# Altium PCB msp430g2553.PcbDoc
Units mm, origin at the board's own origin, x right, y up, seen from the top; angles counter-clockwise.
Board outline 62.36 x 83.44 mm, 2 copper layers (Top Layer, Bottom Layer); 27 components, 20 nets, 111 pads, 11 vias.
Unrouted connection lines stored in the file: 4.
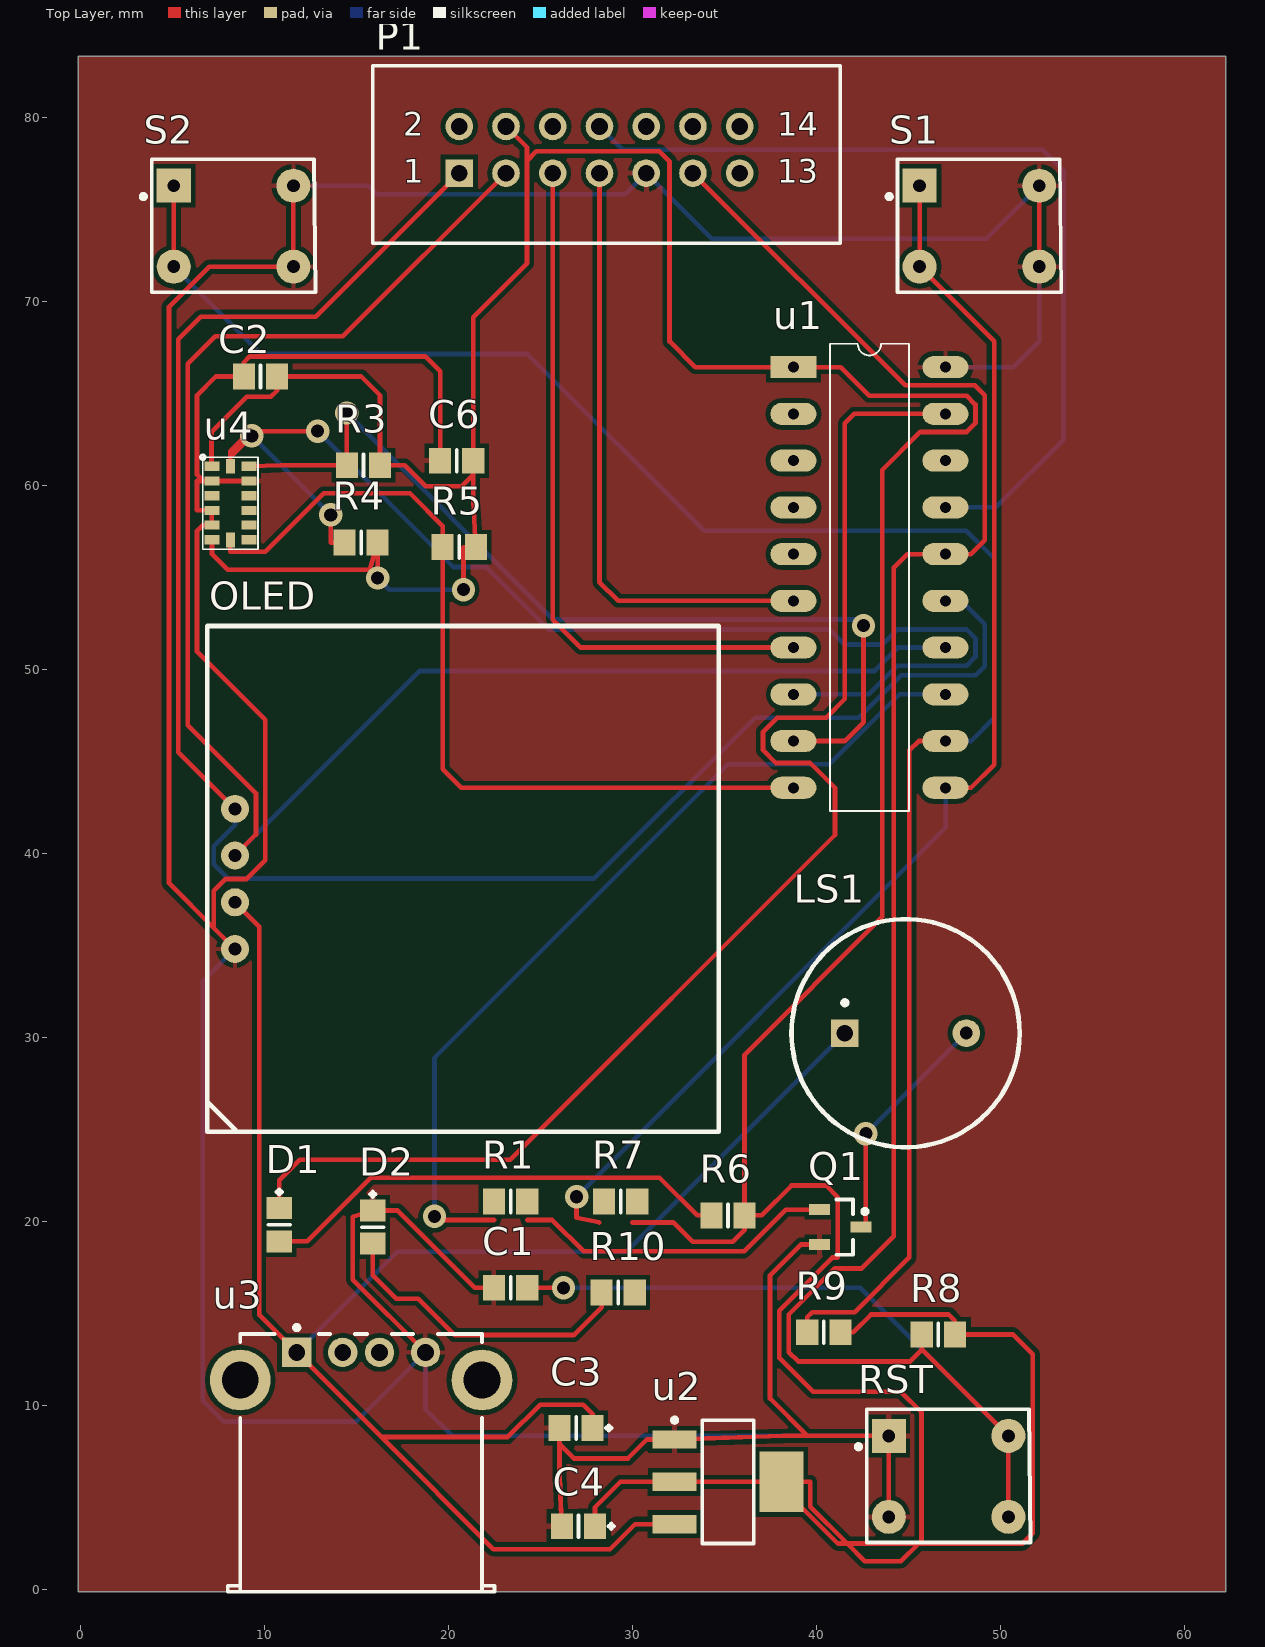
[diagram p0: Top Layer view]
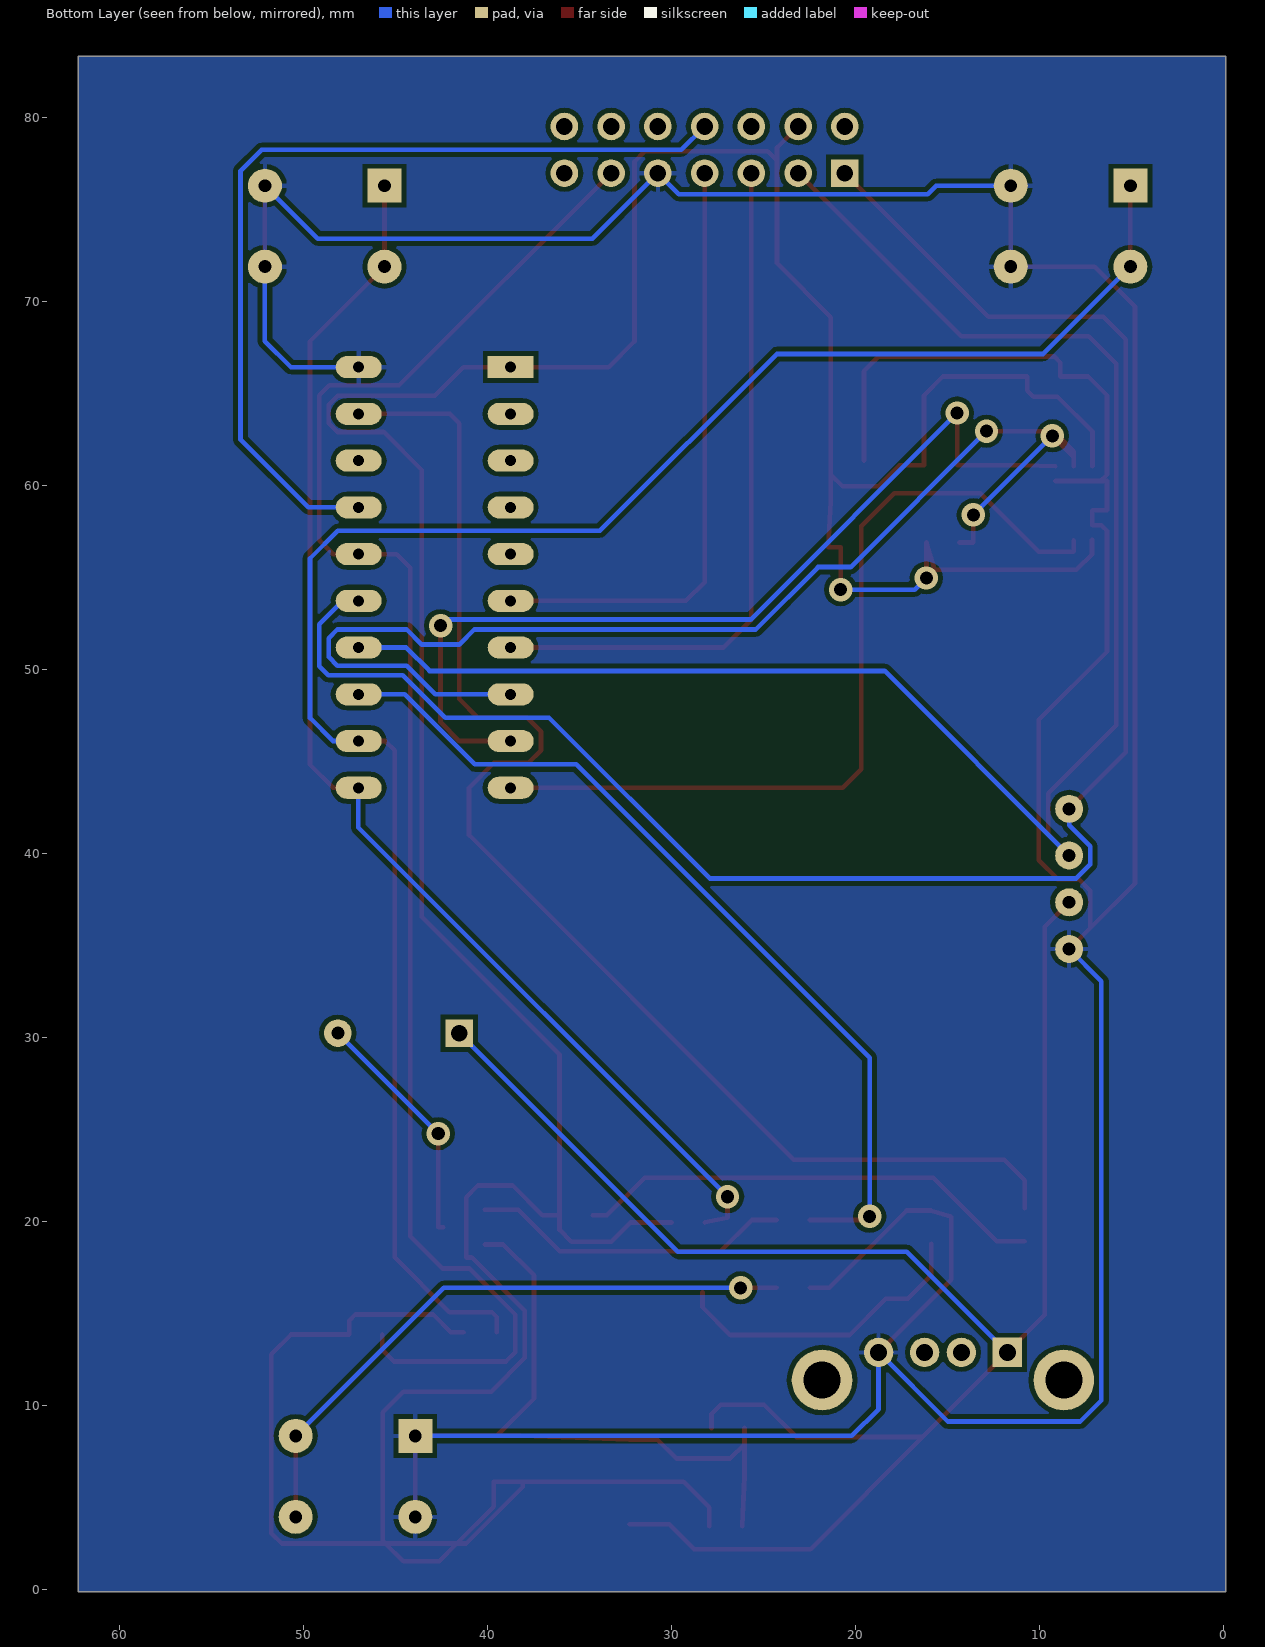
[diagram p1: Bottom Layer view, seen from below]

## Layer stack, top to bottom
Top Solder: solder mask 0.0102, Solder Resist, Dk 3.5
Top Layer: signal copper 0.0356
Dielectric 1: dielectric 0.32, FR-4, Dk 4.8
Bottom Layer: signal copper 0.0356
Bottom Solder: solder mask 0.0102, Solder Resist, Dk 3.5

## Board outline
-0.127,-0.127 62.23,-0.127 62.23,83.312 -0.127,83.312

## Design rules (kind name [scope] priority, off if disabled: settings)
Clearance [All] p1: gap=0.254 ignorepadtopadclearanceinfootprint=FALSE except(0: Arc-Hole Track-Hole SMDPad-Hole THPad-Hole Via-Hole Fill-Hole Poly-Hole Region-Hole Text-Hole)
PolygonConnect [All] p1: connectstyle=Relief reliefconductorwidth=0.254 reliefentries=4 polygonreliefangle="90 Angle" airgapwidth=0.254
RoutingVias [All] p1: holewidth=0.711 width=1.27 viastyle="Through Hole" minholewidth=0.711 minwidth=1.27 maxholewidth=0.711 maxwidth=1.27
SolderMaskExpansion [All] p1: expansion=0.102
Width [All] p1: maxlimit=0.254 minlimit=0.254 preferedwidth=0.254
30 further rules are at their usual default settings.

## Components (designator, comment, footprint, x,y, rotation, side; value= is the part's Value field where it differs from the comment)
C1 "Cap" 6-0805_N 23.368,16.383 r0 top value=100pF
C2 "Cap" 6-0805_N 9.768,65.913 r0 top value=100pF
C3 "Cap Pol2" "6-0805_N - duplicate" 26.924,8.763 r0 top value=10uF
C4 "Cap Pol2" "6-0805_N - duplicate" 27.051,3.429 r0 top value=22uF
C6 "Cap" 6-0805_N 20.436,61.341 r0 top value=100pF
D1 "LED0" "6-0805_N - duplicate" 10.795,19.812 r90 top
D2 "LED0" "6-0805_N - duplicate" 15.875,19.685 r90 top
LS1 "Bell" bell 41.529,30.226 r0 top
OLED "+5" OLED 34.682,24.858 r90 top
P1 "JTAG" HDR2X7 20.574,76.962 r0 top
Q1 "NPN" SOT23_N 41.275,19.685 r0 top
R1 "Res2" 6-0805_N 23.368,21.082 r0 top value=1K
R3 "Res2" 6-0805_N 15.367,61.087 r0 top value=1K
R4 "Res2" 6-0805_N 15.24,56.896 r0 top value=1K
R5 "Res2" 6-0805_N 20.574,56.642 r0 top value=1K
R6 "Res2" 6-0805_N 35.179,20.32 r0 top value=1K
R7 "Res2" 6-0805_N 29.348,21.082 r0 top value=1K
R8 "Res2" 6-0805_N 46.609,13.843 r0 top value=1K
R9 "Res2" 6-0805_N 40.386,13.97 r0 top value=1K
R10 "Res2" 6-0805_N 29.21,16.129 r0 top value=1K
RST "SW-DPST" DPST-4 43.919,3.937 r0 top
S1 "SW-DPST" DPST-4 45.593,71.882 r0 top
S2 "SW-DPST" DPST-4 5.057,71.882 r0 top
u1 "msp430g2553_PDIP20" DIP20 38.735,66.421 r0 top
u2 "AMS1117-3.3V" SOT223_N 35.179,5.842 r0 top
u3 "USB" USB2.5-2H4 15.24,-0.127 r270 top
u4 "ADXL345" ADXL345 6.634,61.526 r0 top

## Footprints (in the part's own frame and the unit in brackets; to place one, negate y for a bottom-side part, rotate by r counter-clockwise, add the part's x,y. Pads: shape width x height; smd on the part's side, far side on the other; paste and mask are expansions set on the pad)
6-0805_N [mm] "Chip Resistor, Body 2.0x1.2mm, IPC Medium Density"
  rect 1.2x1.4 smd: 1(-0.9,0) 2(0.9,0)
  silkscreen extent 0,-0.6 0,0.6, body extent -1.07,-0.7 1.07,0.7, height 0.7
"6-0805_N - duplicate" [mm] "Chip Resistor, Body 2.0x1.2mm, IPC Medium Density"
  rect 1.2x1.4 smd: 1(-0.9,0) 2(0.9,0)
  silkscreen extent 0,-0.6 1.91,0.6, body extent -1.07,-0.7 1.07,0.7, height 0.7
ADXL345 [mm]
  rect 0.813x0.5 smd: 1(0.49,-0.49) 2(0.49,-1.29) 3(0.49,-2.09) 4(0.49,-2.89) 5(0.49,-3.69) 6(0.49,-4.49) 8(2.51,-4.49) 9(2.51,-3.69) 10(2.51,-2.89) 11(2.51,-2.09) 12(2.51,-1.29) 13(2.51,-0.49)
  rect 0.5x0.813 smd: 7(1.5,-4.51) 14(1.5,-0.49)
  silkscreen extent -0.13,-5 3,0.13
bell [mm] "Photosensitive Diode; 2 Leads"
  rect 1.5x1.5 hole 0.9: 1(0,0)
  round 1.5 hole 0.7: 2(6.6,0)
  silkscreen extent -2.9,-6.2 9.5,6.2
DIP20 [mm]
  rect 2.5x1.2 hole 0.6: 1(0,0)
  oval 2.5x1.2 hole 0.6: 2(0,-2.54) 3(0,-5.08) 4(0,-7.62) 5(0,-10.16) 6(0,-12.7) 7(0,-15.24) 8(0,-17.78) 9(0,-20.32) 10(0,-22.86) 11(8.26,-22.86) 12(8.26,-20.32) 13(8.26,-17.78) 14(8.26,-15.24) 15(8.26,-12.7) 16(8.26,-10.16) 17(8.26,-7.62) 18(8.26,-5.08) 19(8.26,-2.54) 20(8.26,0)
  silkscreen extent 1.99,-24.13 6.28,1.27
DPST-4 [mm] "Switch; 4 Leads"
  rect 1.85x1.85 hole 0.7: 1(0,4.4)
  round 1.85 hole 0.7: 2(0,0) 3(6.5,4.4) 4(6.5,0)
  silkscreen extent -1.78,-1.4 7.7,5.84
HDR2X7 [mm] "Connector; Header; 7x2 Position"
  rect 1.5x1.5 hole 0.9: 1(0,0)
  round 1.5 hole 0.9: 2(0,2.54) 3(2.54,0) 4(2.54,2.54) 5(5.08,0) 6(5.08,2.54) 7(7.62,0) 8(7.62,2.54) 9(10.16,0) 10(10.16,2.54) 11(12.7,0) 12(12.7,2.54) 13(15.24,0) 14(15.24,2.54)
  silkscreen extent -4.7,-3.81 20.7,5.84
OLED [mm]
  round 1.524 hole 0.7: 1(12.48,26.3) 2(9.94,26.3) 3(15.02,26.3) 4(17.56,26.3)
  silkscreen extent 0,0 27.5,27.81
SOT23_N [mm] "SOT23, 3-Leads, Body 2.9x1.3mm, Pitch 0.95mm, Lead Span 2.3mm - Reverse Pinning, IPC Medium Density"
  rect 1.15x0.6 smd: 1(1.125,0) 2(-1.125,0.95) 3(-1.125,-0.95)
  silkscreen extent -0.2,-1.5 1.48,1.5, body extent -0.7,-1.5 0.7,1.5, height 1.1
SOT223_N [mm] "SOT223, 4-Leads, Body 6.5x3.5mm, Pitch 2.3mm, Lead Span 7mm, IPC Medium Density"
  rect 2.4x1 smd: 1(-2.9,2.3) 2(-2.9,0) 3(-2.9,-2.3)
  rect 2.4x3.3 smd: 4(2.9,0)
  silkscreen extent -3.02,-3.35 1.4,3.47, body extent -1.85,-3.35 1.85,3.35, height 1.7
USB2.5-2H4 [mm] "Connector; USB1.1, Series A, Reverse Type, Thru-Hole; 4 Position; Right Angle"
  rect 1.6x1.6 hole 0.92: 1(-13,-3.5)
  round 1.6 hole 0.92: 2(-13,-1) 3(-13,1) 4(-13,3.5)
  round 3.3 hole 2: 5(-11.5,6.57) 6(-11.5,-6.57)
  silkscreen extent -14.47,-7.25 0,7.25, body extent -14,-7.25 0,7.25, height 6.5

## Part data
C1 C2 C6: "Capacitor", LatestRevisionDate=17-Jul-2002, LatestRevisionNote="Re-released for DXP Platform.", PackageDescription="Radial Cap, Thru-Hole; 2 Leads; 0.3 in Pin Spacing", PackageReference=RAD-0.3, Published=8-Jun-2000, Publisher="Altium Limited"
C3 C4: "Polarized Capacitor (Axial)", LatestRevisionDate=17-Jul-2002, LatestRevisionNote="Re-released for DXP Platform.", PackageDescription="Polarized Capacitor; 2 Leads", PackageReference=POLAR0.8, Published=8-Jun-2000, Publisher="Altium Limited"
D1 D2: "Typical INFRARED GaAs LED", LatestRevisionDate=08-Jul-2005, LatestRevisionNote="Mech Layer 1 removed.", PackageDescription="LED; 2 Leads", PackageReference=LED-0, Published=8-Jun-2000, Publisher="Altium Limited"
LS1: "Electrical Bell", LatestRevisionDate=17-Jul-2002, LatestRevisionNote="Re-released for DXP Platform.", PackageReference=PIN2, Published=24-Mar-1999, Publisher="Altium Limited"
OLED: library part OLED
P1: "Header, 7-Pin, Dual row", LatestRevisionDate=17-Jul-2002, LatestRevisionNote="Re-released for DXP Platform.", Publisher="Altium Limited"
Q1: "NPN Bipolar Transistor", Code_JEDEC=TO-226-AA, LatestRevisionDate=17-Jul-2002, LatestRevisionNote="Re-released for DXP Platform.", PackageDescription="TO, Flat Index; 3 In-Line, Axial Leads; Body Dia. 4.8mm; Leads 0.55 x 0.51 mm (max)", PackageReference=TO-226-AA, Published=8-Jun-2000, Publisher="Altium Limited"
R1 R3 R4 R5 R6 R7 R8 R9 R10: "Resistor", LatestRevisionDate=17-Jul-2002, LatestRevisionNote="Re-released for DXP Platform.", PackageDescription="Axial Device, Thru-Hole; 2 Leads; 0.4 in Pin Spacing", PackageReference=AXIAL-0.4, Published=8-Jun-2000, Publisher="Altium Limited"
RST S1 S2: "Double-Pole, Single-Throw Switch", LatestRevisionDate=17-Jul-2002, LatestRevisionNote="Re-released for DXP Platform.", PackageDescription="Switch; 4 Leads", PackageReference=DPST-4, Published=24-Mar-1999, Publisher="Altium Limited"

## Via types
v1: diameter 1.27, hole 0.711, Top Layer to Bottom Layer, 11 vias

## Nets (pads, with @x,y where several pads share a name; then routed paths per layer and width w, separated by ;. In a path a pad name is that pad's centre, name@x,y a point inside that pad or via, vN(x,y) a via of type N, cw(c..) or ccw(c..) an arc to the next point about the centre after c; other vN are vias at no path point)
+5V: C3.2 LS1.1 OLED.1 u2.3 u3.1 | length 101.6
  Top Layer w0.254: OLED.1 9.703,36.017 9.703,14.91 u3.1 16.333,8.28 ; C3.2 27.824,9.525 27.316,10.033 24.968,10.033 23.216,8.28 16.333,8.28 ; u2.3 30.124,3.542 28.767,2.184 22.429,2.184 16.333,8.28
  Bottom Layer w0.254: u3.1 17.206,18.339 29.646,18.339 LS1.1@41.533,30.226
BEEP: R1.1 u1.13 | length 47.9
  Top Layer w0.254: v1(19.228,20.269) 19.431,20.066 22.468,20.066
  Bottom Layer w0.254: v1(19.228,20.269) 19.228,28.88 35.179,44.831 40.691,44.831 44.501,48.641 u1.13
CS: R5.1 u1.10 u4.7 | length 46.9
  Top Layer w0.254: u4.7 8.134,56.388 10.033,56.388 13.208,59.563 17.896,59.563 19.674,57.785 R5.1 19.674,44.577 20.69,43.561 u1.10
GND: C1.1 C2.1 C3.1 C4.1 C6.1 D2.2 OLED.2 P1.9 Q1.3 RST.1 RST.2 S1.3 S1.4 S2.3 S2.4 u1.20 u2.1 u3.4 u4.2 u4.4 u4.5 u4.12 | length 290.9
  Top Layer w0.254: OLED.2 7.239,35.941 ; u4.12 u4.2 6.668,60.236 ; S2.3 S2.4 6.985,71.882 4.801,69.698 4.801,38.379 7.239,35.941 ; u3.4 14.783,16.83 14.783,20.234 D2.2 17.221,20.585 21.423,16.383 C1.1 ; C6.1 19.536,66.189 18.72,67.005 9.198,67.005 8.868,66.675 C2.1 7.341,65.913 6.325,64.897 6.325,60.579 6.668,60.236 ; C3.1 26.024,7.885 ; C4.1 26.024,6.147 26.024,7.885 ; Q1.3 39.142,18.735 37.465,17.058 37.465,10.369 39.497,8.337 ; RST.2 RST.1 39.497,8.337 ; S1.4 S1.3 ; 6.668,60.236 6.325,60.236 6.325,58.636 u4.4 u4.5 6.63,57.836 6.325,57.531 6.325,50.965 10.033,47.257 10.033,39.624 9.017,38.608 7.874,38.608 7.239,37.973 7.239,35.941 ; 26.024,7.885 26.797,7.112 29.743,7.112 30.773,8.142 u2.1 38.193,8.337 39.497,8.337
  Bottom Layer w0.254: OLED.2 6.629,33.045 6.629,10.262 7.772,9.119 14.986,9.119 u3.4 18.74,9.79 20.193,8.337 RST.1 ; S2.3 15.615,76.282 16.078,75.819 29.591,75.819 P1.9 34.29,73.406 49.217,73.406 S1.3 ; u1.20 50.673,66.421 52.093,67.841 S1.4
LED1: D1.2 u1.19 | length 73.7
  Top Layer w0.254: D1.2 10.795,22.225 11.913,23.343 23.343,23.343 40.996,40.996 40.996,43.561 39.649,44.907 37.77,44.907 37.084,45.593 37.084,46.609 37.846,47.371 40.513,47.371 41.529,48.387 41.529,63.373 42.037,63.881 u1.19
NetD1_1: D1.1 R6.1 | length 25.8
  Top Layer w0.254: D1.1 12.319,18.912 15.773,22.366 31.456,22.366 33.503,20.32 R6.1
NetD2_1: D2.1 R10.1 | length 16.9
  Top Layer w0.254: D2.1 15.875,17.069 17.145,15.799 18.339,15.799 20.32,13.818 26.789,13.818 28.31,15.338 R10.1
NetLS1_2: LS1.2 Q1.1 | length 13.1
  Top Layer w0.254: Q1.1 42.672,19.685 v1(42.672,24.765)
  Bottom Layer w0.254: v1(42.672,24.765) LS1.2@48.133,30.226
NetQ1_2: Q1.2 R1.2 | length 17.5
  Top Layer w0.254: 24.268,20.066 25.629,20.066 27.33,18.364 36.058,18.364 38.329,20.635 Q1.2
RST: C1.2 P1.11 R8.1 RST.3 RST.4 u1.16 | length 129.2
  Top Layer w0.254: C1.2 v1(26.238,16.383) ; P1.11 44.806,65.43 48.601,65.43 49.134,64.897 49.134,57.023 48.372,56.261 u1.16 44.929,56.261 44.196,55.528 44.196,19.177 42.457,17.438 40.984,17.438 38.481,14.935 38.481,12.892 38.989,12.384 45.085,12.384 45.709,13.008 45.709,13.047 ; R8.1 45.709,13.047 ; RST.4 RST.3 45.709,13.047
  Bottom Layer w0.254: v1(26.238,16.383) 42.373,16.383 RST.3
SCL: OLED.3 P1.3 u1.14 | length 93.6
  Top Layer w0.254: OLED.3 9.525,41.021 9.525,43.256 5.817,46.965 5.817,66.599 7.315,68.097 14.249,68.097 P1.3
  Bottom Layer w0.254: OLED.3 18.415,49.911 43.144,49.911 44.414,51.181 u1.14
SCLK: R4.1 u1.8 u4.14 | length 68.8
  Top Layer w0.254: u4.14 8.134,61.525 ; v1(9.296,62.687) 8.134,61.525 ; v1(12.878,62.941) 9.226,62.941 8.134,61.849 8.134,61.525 ; v1(13.589,58.395) 13.589,56.896 R4.1
  Bottom Layer w0.254: v1(9.296,62.687) v1(13.589,58.395) ; v1(12.878,62.941) 20.261,55.558 22.031,55.558 25.427,52.162 40.711,52.162 41.529,51.344 43.561,51.344 44.379,52.162 48.153,52.162 48.626,51.689 48.626,50.673 48.153,50.2 44.383,50.2 42.824,48.641 u1.8
SDA: OLED.4 P1.1 u1.15 | length 101.2
  Top Layer w0.254: OLED.4 5.309,45.491 5.309,67.945 6.528,69.164 12.776,69.164 P1.1
  Bottom Layer w0.254: OLED.4 8.382,41.529 7.239,40.386 7.239,39.395 8.001,38.633 27.915,38.633 36.652,47.371 42.291,47.371 44.602,49.682 48.651,49.682 49.134,50.165 49.134,52.441 47.854,53.721 u1.15
SDI: R3.1 u1.9 u4.13 | length 50.5
  Top Layer w0.254: u4.13 10.889,61.087 R3.1 v1(14.467,63.932) ; u1.9 41.529,46.101 42.545,47.117 v1(42.545,52.375)
  Bottom Layer w0.254: v1(14.467,63.932) 25.694,52.705 42.215,52.705 v1(42.545,52.375)
SW1: R7.1 S1.1 S1.2 u1.11 | length 69.3
  Top Layer w0.254: v1(26.949,21.336) 26.949,20.193 28.183,19.939 ; S1.1 S1.2 49.642,67.833 49.642,44.816 48.387,43.561 u1.11
  Bottom Layer w0.254: v1(26.949,21.336) 47.015,41.402 47.015,43.561 u1.11
SW2: R9.1 S2.1 S2.2 u1.12 | length 104.8
  Top Layer w0.254: S2.2 S2.1 ; R9.1 39.486,14.797 39.751,15.062 42.062,15.062 45.034,18.034 45.034,45.593 45.542,46.101 u1.12
  Bottom Layer w0.254: S2.2 9.807,67.132 24.282,67.132 33.884,57.531 48.133,57.531 49.642,56.022 49.642,47.356 48.387,46.101 u1.12
TCK: P1.7 u1.6 | length 33.2
  Top Layer w0.254: P1.7 28.194,54.737 29.21,53.721 u1.6
TEST: P1.8 u1.17 | length 48.8
  Bottom Layer w0.254: P1.8 29.464,78.232 52.273,78.232 53.416,77.089 53.416,62.484 49.733,58.801 u1.17
TMS: P1.5 u1.7 | length 38
  Top Layer w0.254: P1.5 25.654,52.705 27.178,51.181 u1.7
VDD3V3: C2.2 C4.2 C6.2 P1.4 R3.2 R4.2 R5.2 R6.2 R7.2 R8.2 R9.2 u1.1 u2.2 u2.4 u4.1 u4.6 | length 254.7
  Top Layer w0.254: u4.6 7.137,57.036 7.137,56.261 7.99,55.408 15.697,55.408 R4.2 v1(16.14,54.966) ; u4.1 7.112,61.036 7.112,62.916 9.017,64.821 10.338,64.821 10.668,65.151 C2.2 15.251,65.913 16.267,64.897 R3.2 17.602,61.087 18.745,59.944 20.701,59.944 21.336,60.579 ; v1(20.803,54.331) 20.803,56.642 R5.2 21.336,59.142 21.336,60.579 ; P1.4 24.257,78.359 24.257,77.648 ; C4.2 27.951,4.456 29.337,5.842 u2.2 u2.4 ; 29.983,19.939 32.207,19.939 33.263,18.883 35.433,18.883 36.079,19.529 R6.2 ; R9.2 41.989,13.97 42.954,14.935 47.179,14.935 47.509,14.605 R8.2 50.673,13.843 51.74,12.776 51.74,3.048 51.181,2.489 45.542,2.489 ; 21.336,60.579 C6.2 21.336,69.139 24.257,72.06 24.257,77.648 ; 24.257,77.648 24.765,78.156 31.445,78.156 32.004,77.597 32.004,67.818 33.401,66.421 u1.1 41.3,66.421 42.85,64.872 48.143,64.872 48.626,64.389 48.626,63.373 48.153,62.9 45.628,62.9 43.561,60.833 43.561,36.54 36.079,29.058 R6.2 ; R6.2 37.008,20.32 38.633,21.946 40.513,21.946 41.148,21.311 41.148,18.034 40.861,18.034 37.973,15.146 37.973,12.573 39.802,10.744 44.577,10.744 45.695,9.627 45.695,2.642 45.542,2.489 ; u2.4 38.079,5.558 41.148,2.489 41.656,2.489 ; u2.4 39.649,5.842 39.649,4.496 41.656,2.489 ; 41.656,2.489 45.542,2.489 ; 41.656,2.489 42.621,1.524 44.577,1.524 45.542,2.489
  Bottom Layer w0.254: v1(16.14,54.966) 16.775,54.331 v1(20.803,54.331)
pads on no net: P1.2 P1.6 P1.10 P1.12 P1.13 P1.14 R10.2 u1.2 u1.3 u1.4 u1.5 u1.18 u3.2 u3.3 u3.5 u3.6 u4.3 u4.8 u4.9 u4.10 u4.11

## Polygon pours and split planes (outlines as drawn)
GND on Bottom Layer "GND_L02_P003" (solid, remove dead copper, pour order 3): -0.127,-0.127 62.23,-0.127 62.23,83.312 -0.127,83.312
GND on Top Layer "GND_L01_P002" (solid, remove dead copper, pour order 2): -0.127,-0.127 62.23,-0.127 62.23,83.312 -0.127,83.312

## Silkscreen, mask and mechanical layers (free items; w line width, h text height)
Mechanical 1:
  the board outline again, w0.254

## Text inside footprints (layer, text, board x,y; h text height)
P1: Top Overlay "2" at 17.526,78.994 h1.27; Top Overlay "1" at 17.526,76.454 h1.27; Top Overlay "14" at 37.846,78.994 h1.27; Top Overlay "13" at 37.846,76.454 h1.27
u3: Mechanical 1 "PCB Edge" at 8.937,0.209 h0.25